# Altium PCB PCB_1.pcbdoc
Units mm, origin at the board's own origin, x right, y up, seen from the top; angles counter-clockwise.
Board outline 109.98 x 65.02 mm, 2 copper layers (Top Layer, Bottom Layer); 32 components, 39 nets, 110 pads, 0 vias.
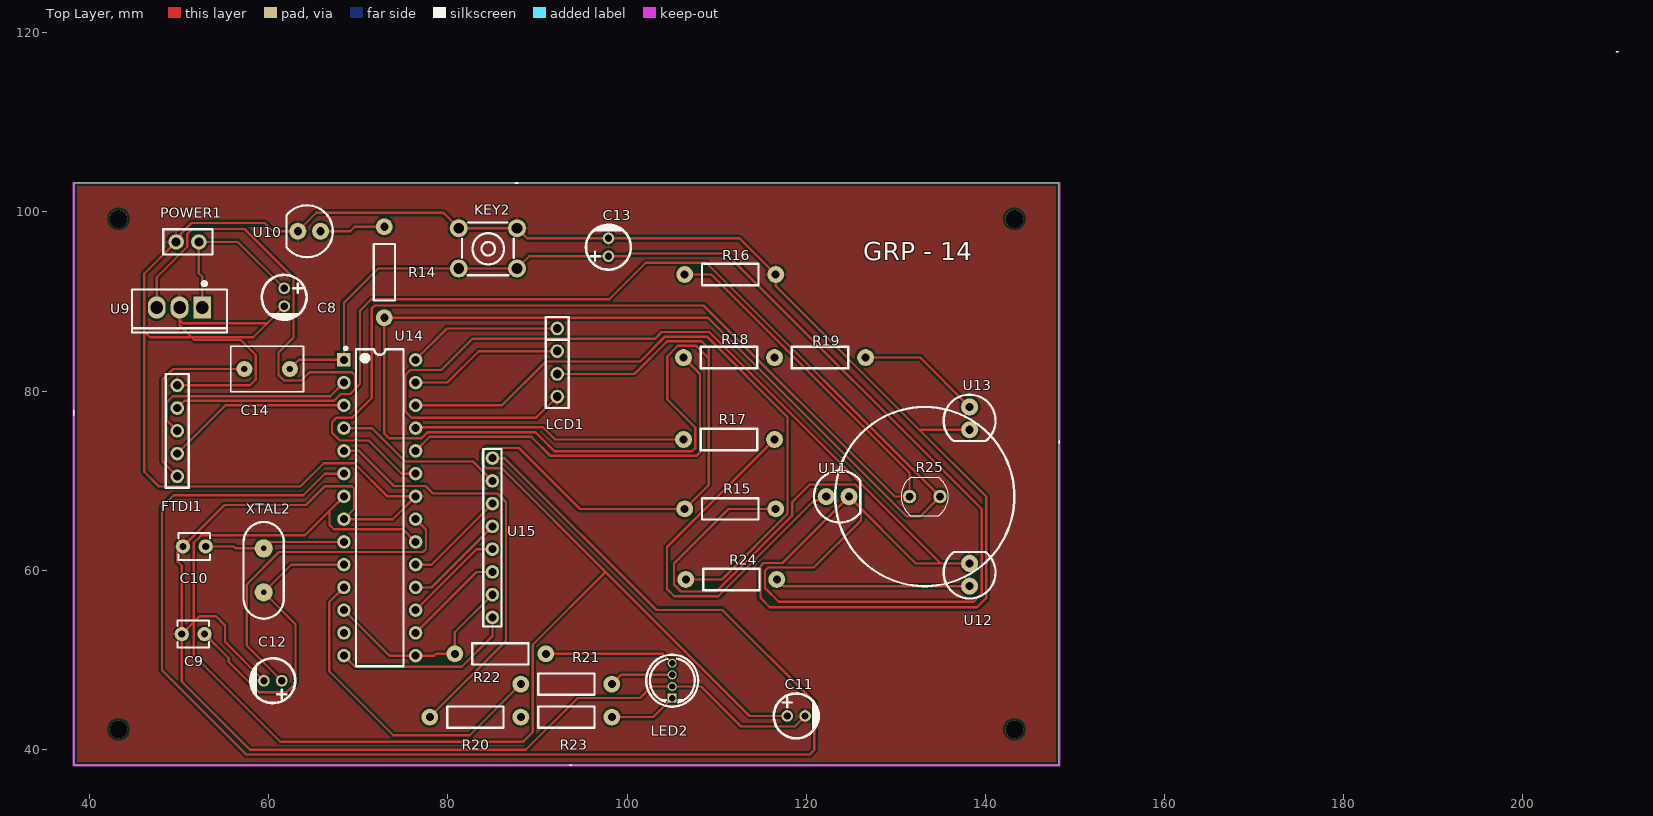
[diagram p0: Top Layer view]
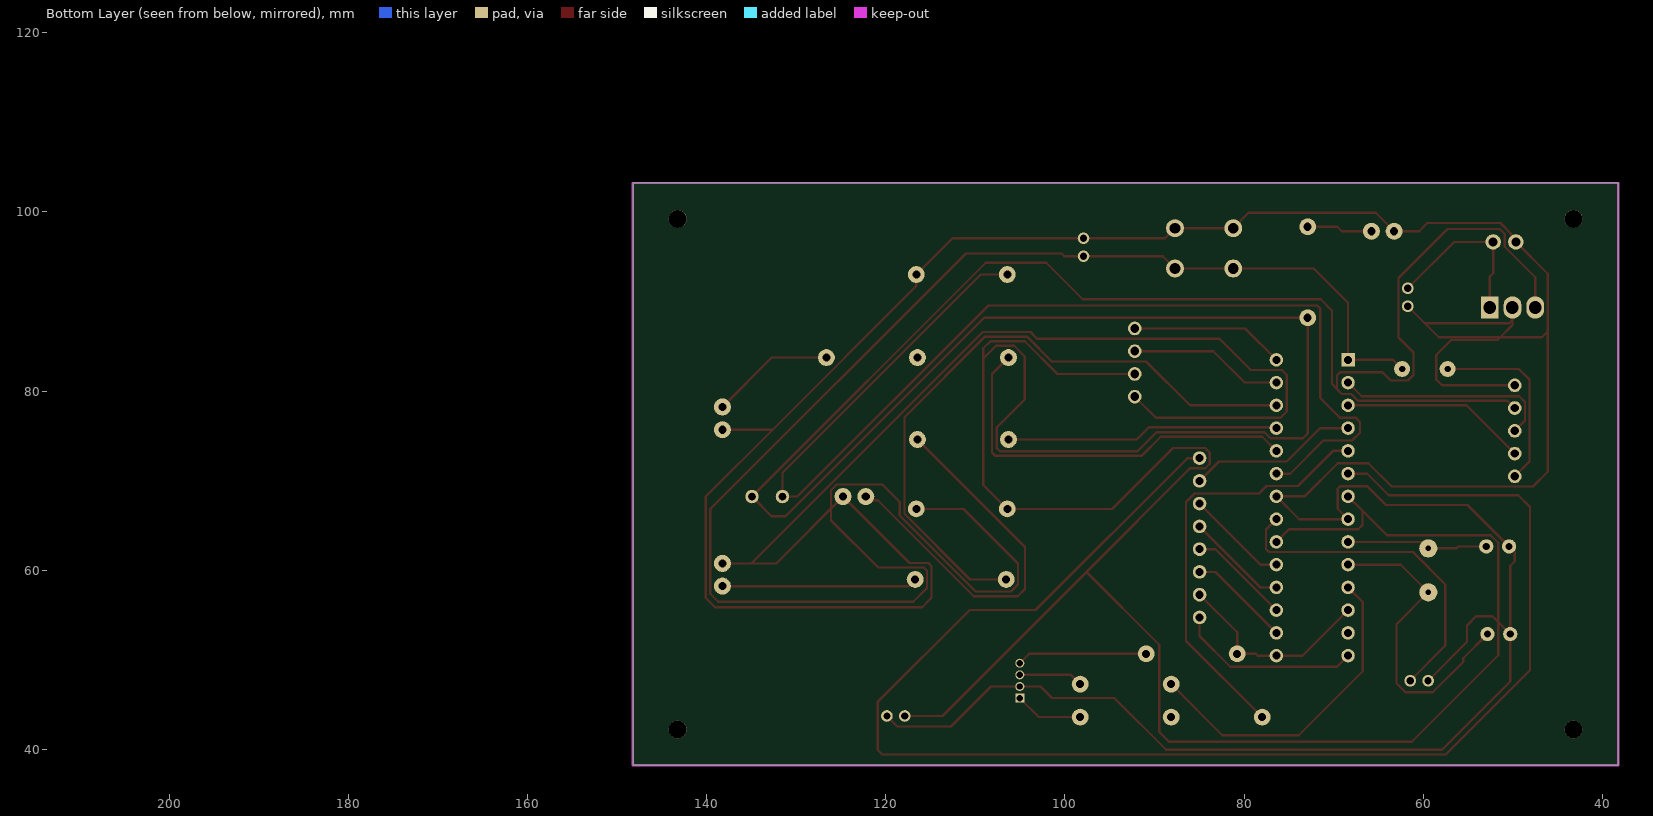
[diagram p1: Bottom Layer view, seen from below]

## Layer stack, top to bottom
Top Solder: solder mask 0.0102, Solder Resist, Dk 3.5
Top Layer: signal copper 0.0356
Dielectric1: dielectric 0.32, FR-4, Dk 4.8
Bottom Layer: signal copper 0.0356
Bottom Solder: solder mask 0.0102, Solder Resist, Dk 3.5

## Board outline
148.209,38.227 38.227,38.227 38.227,103.251 148.209,103.251

## Design rules (kind name [scope] priority, off if disabled: settings)
Clearance [All] p1: gap=0.254 ignorepadtopadclearanceinfootprint=FALSE except(0: Arc-Hole Track-Hole SMDPad-Hole THPad-Hole Via-Hole Fill-Hole Poly-Hole Region-Hole Text-Hole)
PolygonConnect [All] p1: connectstyle=Relief reliefconductorwidth=0.254 reliefentries=4 polygonreliefangle="90 Angle" airgapwidth=0.254
RoutingVias [All] p1: holewidth=0.711 width=1.27 viastyle="Through Hole" minholewidth=0.711 minwidth=1.27 maxholewidth=0.711 maxwidth=1.27
SolderMaskExpansion [All] p1: expansion=0.102 istentingtop=FALSE
Width [All] p1: maxlimit=0.254 minlimit=0.254 preferedwidth=0.254
30 further rules are at their usual default settings.

## Components (designator, comment, footprint, x,y, rotation, side; value= is the part's Value field where it differs from the comment)
C8 "330nF" CAP-TH_BD5.0-P2.00-D0.8-FD 61.722,90.472 r270 top
C9 "22pF" CAP-TH_L3.5-W3.0-P2.54-D0.8 51.562,52.88 r0 top
C10 "22pF" CAP-TH_L3.5-W3.0-P2.54-D0.8 51.689,62.659 r0 top
C11 "100nF" CAP-TH_BD5.0-P2.00-D0.8-FD 118.872,43.736 r0 top
C12 "100nF" CAP-TH_BD5.0-P2.00-D0.8-FD 60.452,47.673 r180 top
C13 "100nF" CAP-TH_BD5.0-P2.00-D0.8-FD 97.917,96.06 r90 top
C14 "100nF" RAD-0.2 59.817,82.471 r0 top
FTDI1 "Male Header 1*5P" "MALE HEADER 5P" 49.784,70.485 r180 top
KEY2 "RST_BTN" KEY-TH_4P-L6.0-W6.0-P4.50 84.455,95.933 r180 top
LCD1 "Header-Male-2.54_1x4" MALE_HEADER_4_PIN 92.202,83.185 r270 top
LED2 "φ5 RGB Transparent" LED-TH_4P-BD5.8-P1.30 105.029,47.673 r270 top
POWER1 "2 Pin Male Header" 1X2/2.54_MALE_PIN_HEADER 50.927,95.377 r180 top
R14 "330Ω" AXIAL-0.4 72.898,93.266 r90 top
R15 "10K" AXIAL-0.4 111.506,66.85 r180 top
R16 "1K" AXIAL-0.4 111.506,93.012 r0 top
R17 "330Ω" AXIAL-0.4 111.379,74.597 r0 top
R18 "330Ω" AXIAL-0.4 111.379,83.741 r0 top
R19 "330Ω" AXIAL-0.4 121.539,83.741 r0 top
R20 "330Ω" AXIAL-0.4 83.058,43.609 r0 top
R21 "330Ω" AXIAL-0.4 93.218,47.292 r0 top
R22 "330Ω" AXIAL-0.4 85.852,50.673 r0 top
R23 "330Ω" AXIAL-0.4 93.218,43.609 r0 top
R24 "330Ω" AXIAL-0.4 111.633,58.976 r0 top
R25 "LDR07" RESISTOR_LDR_5.1X4.3_RM3.4 133.227,68.227 r0 top
U9 "7805_Regulator" TO-220-3_L10.0-W4.5-P2.54-L 50.038,89.329 r180 top
U10 "LED" "5MM LED" 65.786,97.838 r180 top
U11 "GREEN_LED" "5MM LED" 122.227,68.227 r0 top
U12 "BLUE_LED" "5MM LED" 138.227,58.227 r90 top
U13 "RED_LED" "5MM LED" 138.227,78.227 r270 top
U14 "ATMEGA _328P-PU" DIP-28_L34.6-W7.3-P2.54-LS10.2-BL 72.39,66.977 r270 top
U15 "8 pin Male header" "8 PIN MALE HEADER PCB" 84.963,72.517 r180 top
XTAL2 "16MHz" "16MHZ_OSC [PCB]" 59.436,59.992 r0 top

## Footprints (in the part's own frame and the unit in brackets; to place one, negate y for a bottom-side part, rotate by r counter-clockwise, add the part's x,y. Pads: shape width x height; smd on the part's side, far side on the other; paste and mask are expansions set on the pad)
1X2/2.54_MALE_PIN_HEADER [mil]
  round 67.99 hole 40: 1(-50,-50) 2(50,-50)
  silkscreen extent -109,-106 107,6
"5MM LED" [mm]
  round 1.9 hole 0.914: 1(0,0) 2(2.54,0)
  silkscreen extent -1.37,-2.9 3.81,2.9
"8 PIN MALE HEADER PCB" [mil]
  round 60 hole 36: 1(0,700) 2(0,600) 3(0,500) 4(0,400) 5(0,300) 6(0,200) 7(0,100) 8(0,0)
  silkscreen extent -40,-40 40,740
"16MHZ_OSC [PCB]" [mil]
  round 80 hole 25: 1(0,96.46) 2(0,-96.46)
  silkscreen extent -88,-212 88,212
AXIAL-0.4 [mil]
  round 74 hole 35.4: 1(-200,0) 2(200,0)
  silkscreen extent -124,-47 124,47
CAP-TH_BD5.0-P2.00-D0.8-FD [mm]
  round 1.3 hole 0.8: 1(-1,0) 2(1,0)
  silkscreen extent -2.5,-2.5 2.5,2.5
CAP-TH_L3.5-W3.0-P2.54-D0.8 [mm]
  round 1.6 hole 0.8: 1(-1.27,0) 2(1.27,0)
  silkscreen extent -1.75,-1.5 1.75,1.5
DIP-28_L34.6-W7.3-P2.54-LS10.2-BL [mm]
  rect 1.5x1.5 hole 0.9: 1(-16.51,-4)
  round 1.5 hole 0.9: 2(-13.97,-4) 3(-11.43,-4) 4(-8.89,-4) 5(-6.35,-4) 6(-3.81,-4) 7(-1.27,-4) 8(1.27,-4) 9(3.81,-4) 10(6.35,-4) 11(8.89,-4) 12(11.43,-4) 13(13.97,-4) 14(16.51,-4) 15(16.51,4) 16(13.97,4) 17(11.43,4) 18(8.89,4) 19(6.35,4) 20(3.81,4) 21(1.27,4) 22(-1.27,4) 23(-3.81,4) 24(-6.35,4) 25(-8.89,4) 26(-11.43,4) 27(-13.97,4) 28(-16.51,4)
  silkscreen extent -17.94,-3.95 17.7,2.65
KEY-TH_4P-L6.0-W6.0-P4.50 [mm]
  round 2 hole 1.2: 1(-3.25,-2.25) 2(3.25,-2.25) 3(3.25,2.25) 4(-3.25,2.25)
  silkscreen extent -2.9,-2.9 2.9,3
LED-TH_4P-BD5.8-P1.30 [mm]
  rect 1x1 hole 0.7: 1(1.95,0)
  round 1 hole 0.7: 2(0.65,0) 3(-0.65,0) 4(-1.95,0)
  silkscreen extent -2.9,-2.9 2.9,2.9
"MALE HEADER 5P" [mil]
  round 60 hole 36: 1(0,0) 2(0,-100) 3(0,-200) 4(0,-300) 5(0,-400)
  silkscreen extent -50,-450 50,50
MALE_HEADER_4_PIN [mil]
  round 60 hole 39.37: 1(-150,0) 2(-50,0) 3(50,0) 4(150,0)
  silkscreen extent -200,-50 200,50
RAD-0.2 [mil]
  round 70 hole 28: 1(100,0) 2(-100,0)
  silkscreen extent -160,-100 160,100
RESISTOR_LDR_5.1X4.3_RM3.4 [mm]
  round 1.5 hole 0.8 slot 0.805 at 0 deg: 1(-1.7,0) 2(1.701,0)
  silkscreen extent -2.65,-2.15 2.62,2.17
TO-220-3_L10.0-W4.5-P2.54-L [mm]
  rect 2x2.5 hole 1.4: 1(-2.54,0)
  oval 2x2.5 hole 1.4: 2(0,0) 3(2.54,0)
  silkscreen extent -5.3,-2.86 5.3,2.8

## Free pads (board coordinates)
  round 2 hole 2 unplated: ""(43.227,42.227) ""(43.227,99.227) ""(143.227,42.227) ""(143.227,99.227)

## Nets (pads, with @x,y where several pads share a name; then routed paths per layer and width w, separated by ;. In a path a pad name is that pad's centre, name@x,y a point inside that pad or via, vN(x,y) a via of type N, cw(c..) or ccw(c..) an arc to the next point about the centre after c; other vN are vias at no path point)
1: U14.18 U15.5 | length 11.4
  Top Layer w0.254: U14.18 78.153,58.087 U15.5
2: U14.19 U15.6 | length 11.4
  Top Layer w0.254: U14.19 78.153,60.627 U15.6
3: U14.4 U15.7 | length 19
  Top Layer w0.254: U14.4 71.504,75.867 75.222,72.149 82.791,72.149 U15.7
4: U14.6 U15.8 | length 169.5
  Top Layer w0.254: U14.6 66.254,70.787 63.844,68.377 49.403,68.377 48.082,67.056 48.082,48.844 57.481,39.446 120.395,39.446 120.904,39.954 120.904,45.288 110.617,55.575 103.269,55.575 86.327,72.517 U15.8
5V: C11.1 FTDI1.4 LCD1.3 R14.1 R15.2 R25.2 U9.3 U14.7 U14.20 | length 509.7
  Top Layer w0.254: U9.3 47.498,92.71 50.902,96.114 50.902,97.536 51.46,98.095 57.302,98.095 62.763,92.634 62.763,85.979 61.087,84.303 61.087,81.788 61.697,81.178 63.627,81.178 64.541,82.093 69.291,82.093 69.621,81.763 69.621,80.213 ; FTDI1.4 50.597,78.918 67.285,78.918 68.047,79.68 69.088,79.68 69.621,80.213 ; U14.7 66.777,66.634 ; U14.20 74.99,64.567 67.259,64.567 66.777,65.049 66.777,66.634 ; LCD1.3 100.815,81.915 104.473,85.573 108.315,85.573 109.106,84.782 109.106,83.642 ; C11.1 113.668,43.736 97.587,59.817 ; 66.777,66.634 64.049,63.906 52.476,63.906 51.638,63.068 51.638,50.521 61.29,40.869 88.392,40.869 89.459,41.935 89.459,51.689 97.587,59.817 ; 69.621,80.213 70.18,80.823 70.18,88.976 71.45,90.246 97.993,90.246 102.08,94.333 108.822,94.333 R25.2 132.741,66.04 131.18,66.04 109.034,88.186 R14.1 72.898,75.26 73.431,74.727 77.04,74.727 77.724,75.411 89.764,75.411 91.899,73.276 107.236,73.276 107.62,73.66 107.62,75.921 104.47,79.07 104.47,83.871 105.664,85.065 107.696,85.065 109.106,83.642 ; 97.587,59.817 86.03,71.374 84.328,71.374 83.82,71.882 83.82,73.152 84.328,73.66 87.92,73.66 94.73,66.85 R15.2 109.106,69.53 109.106,83.642
A: U14.14 U15.1 | length 20.6
  Top Layer w0.254: U14.14 69.632,49.225 81.534,49.225 84.963,52.654 U15.1
B: R22.1 U14.12 U14.15 U15.2 | length 22.9
  Top Layer w0.254: U14.12 73.47,50.467 U14.15 78.461,50.467 78.667,50.673 R22.1 80.772,53.086 U15.2
BLUE: R24.1 U14.26 | length 73.6
  Top Layer w0.254: U14.26 86.027,78.407 90.932,83.312 101.459,83.312 104.228,86.081 108.912,86.081 117.907,77.086 117.907,66.303 110.58,58.976 R24.1
C: U14.16 U15.3 | length 11.4
  Top Layer w0.254: U14.16 83.2,59.817 U15.3
C5_2: C14.2 FTDI1.1 | length 21.1
  Top Layer w0.254: FTDI1.1 48.133,72.136 48.133,81.28 49.324,82.471 C14.2
D: U14.17 U15.4 | length 11.4
  Top Layer w0.254: U14.17 83.2,62.357 U15.4
G: R21.1 U14.11 | length 36.7
  Top Layer w0.254: U14.11 66.751,56.448 66.751,48.729 73.887,41.593 82.438,41.593 R21.1
GND: C8.2 C9.1 C10.1 C11.2 C12.2 C13.2 FTDI1.5 KEY2.1 KEY2.2 LCD1.4 LED2.2 POWER1.2 R16.2 U9.2 U10.2 U11.2 U12.2 U13.2 U14.8 U14.22 | length 531.7
  Top Layer w0.254: FTDI1.5 57.912,80.645 58.547,81.28 58.547,84.023 56.871,85.7 51.714,85.7 51.41,86.004 ; U9.2 50.038,87.935 ; C12.2 55.118,52.007 55.118,53.848 54.102,54.864 52.276,54.864 C9.1 ; C8.2 59.829,87.579 ; LCD1.4 89.84,77.013 75.946,77.013 75.235,77.724 75.235,81.788 75.794,82.347 79.248,82.347 82.753,85.852 103.099,85.852 103.835,86.589 109.176,86.589 134.998,60.767 ; C11.2 118.706,42.57 112.7,42.57 108.247,47.023 LED2.2 102.725,47.023 101.448,45.745 94.488,45.745 88.697,39.954 57.912,39.954 50.292,47.574 C9.1 ; U12.2 134.998,60.767 ; U13.2 132.618,75.687 ; 46.101,86.639 46.101,70.993 47.752,69.342 63.525,69.342 66.142,71.958 69.545,71.958 73.256,68.247 U14.22 73.85,65.707 U14.8 69.545,66.862 69.545,69.088 69.24,69.393 66.269,69.393 64.16,67.285 55.045,67.285 C10.1 49.784,62.024 49.784,61.008 50.292,60.5 C9.1 ; 46.101,86.639 46.101,93.091 POWER1.2 50.165,97.155 50.165,97.536 51.384,98.755 59.538,98.755 60.455,97.838 U10.2 65.306,99.898 79.49,99.898 KEY2.2 KEY2.1 88.828,97.06 C13.2 112.538,97.06 R16.2 116.586,91.719 132.618,75.687 ; 46.101,86.639 46.736,86.004 51.41,86.004 ; 50.038,87.935 50.038,87.376 51.41,86.004 ; 50.038,87.935 50.394,87.579 59.829,87.579 ; 51.41,86.004 58.254,86.004 59.829,87.579 ; 132.618,75.687 140.081,68.224 140.081,56.896 139.065,55.88 115.926,55.88 114.884,56.921 114.884,60.452 115.237,60.805 117.345,60.805 U11.2 132.227,60.767 134.998,60.767
GREEN: R17.1 U14.25 | length 30.5
  Top Layer w0.254: U14.25 76.494,75.971 90.599,75.971 91.973,74.597 R17.1
LDR: R16.1 R25.1 U14.23 | length 133.9
  Top Layer w0.254: U14.23 74.857,70.787 71.171,74.473 67.945,74.473 67.056,75.362 67.056,76.53 67.564,77.038 69.317,77.038 71.503,79.224 71.503,89.206 71.857,89.56 108.534,89.56 129.868,68.227 R25.1 131.527,70.88 109.395,93.012 R16.1
R: R20.1 U14.5 | length 48
  Top Layer w0.254: U14.5 70.07,73.327 73.981,69.416 77.498,69.416 78.334,68.58 85.524,68.58 86.473,67.631 86.473,52.104 R20.1
R2_2: R24.2 U12.1 | length 21.8
  Top Layer w0.254: R24.2 117.462,58.227 U12.1
R3_2: R14.2 U10.1 | length 7.3
  Top Layer w0.254: U10.1 69.088,97.838 69.596,98.346 R14.2
R9_1: R18.2 R19.1
R11_2: LED2.3 R21.2 | length 7.2
  Top Layer w0.254: R21.2 99.329,48.323 LED2.3
R12_2: LED2.4 R22.2 | length 14.5
  Top Layer w0.254: R22.2 103.979,50.673 LED2.4
R13_1: R20.2 R23.1
R13_2: LED2.1 R23.2 | length 7.6
  Top Layer w0.254: R23.2 102.915,43.609 LED2.1
RED: R18.1 U14.24 | length 44.8
  Top Layer w0.254: U14.24 77.966,74.903 89.308,74.903 91.443,72.768 107.744,72.768 108.128,73.152 108.128,81.912 R18.1
RESET: C13.1 C14.1 KEY2.3 KEY2.4 R15.1 U14.1 | length 194.6
  Top Layer w0.254: C14.1 63.373,83.487 U14.1 68.39,89.865 72.208,93.683 KEY2.3 KEY2.4 89.082,95.06 C13.1 100.065,95.06 100.353,95.349 111.052,95.349 139.573,66.827 139.573,57.379 138.684,56.49 116.916,56.49 115.392,58.014 115.392,59.944 115.745,60.297 120.845,60.297 126.111,65.562 126.111,68.936 125.476,69.571 120.396,69.571 118.437,67.612 118.437,66.115 109.955,57.633 106.02,57.633 105.232,58.42 105.232,60.755 111.328,66.85 R15.1
RX: FTDI1.3 U14.2 | length 24.3
  Top Layer w0.254: FTDI1.3 48.641,76.708 48.641,78.791 49.276,79.426 66.869,79.426 U14.2
S$1303: 
S$1308: 
S$1310: 
S$1312: 
SCL: LCD1.1 U14.28 | length 17.3
  Top Layer w0.254: U14.28 79.898,86.995 LCD1.1
SDA: LCD1.2 U14.27 | length 17.3
  Top Layer w0.254: U14.27 79.931,80.947 83.439,84.455 LCD1.2
TX: FTDI1.2 U14.3 | length 20.8
  Top Layer w0.254: FTDI1.2 55.166,78.407 U14.3
U1_9: C10.2 U14.9 XTAL2.1 | length 15.8
  Top Layer w0.254: C10.2 56.083,62.659 56.3,62.442 XTAL2.1 60.161,63.167 U14.9
U1_10: C9.2 U14.10 XTAL2.2 | length 35.4
  Top Layer w0.254: C9.2 55.54,50.172 55.54,49.768 58.928,46.38 61.976,46.38 62.992,47.396 62.992,53.986 XTAL2.2 62.521,60.627 U14.10
U1_21: C12.1 U14.21 | length 37.8
  Top Layer w0.254: C12.1 57.531,51.594 57.531,58.42 61.138,62.027 77.216,62.027 77.546,62.357 77.546,64.551 U14.21
U6_1: R17.2 U11.1 | length 44.6
  Top Layer w0.254: R17.2 104.457,62.595 104.457,57.912 105.27,57.099 110.16,57.099 120.879,67.818 122.227,67.818 U11.1
U8_1: R19.2 U13.1 | length 13.9
  Top Layer w0.254: R19.2 132.713,83.741 U13.1
VCC: C8.1 POWER1.1 U9.1 | length 19.1
  Top Layer w0.254: U9.1 52.578,92.786 52.197,93.167 POWER1.1 56.547,96.647 C8.1
pads on no net: U14.13

## Polygon pours and split planes (outlines as drawn)
GND on Top Layer "GND_L01_P000" (solid, pour order 0): 38.227,103.227 38.227,38.227 148.227,38.227 148.227,103.227

## Silkscreen, mask and mechanical layers (free items; w line width, h text height)
Top Overlay:
  circle w0.254: c133.227,68.227 r10
  lines w0.2: 38.227,77.343 38.227,77.827 ; 87.503,103.227 87.757,103.227 ; 93.626,38.227 93.826,38.227 ; 148.227,74.222 148.227,74.422 ; 210.439,117.883 210.639,117.883
  text "GRP - 14" at 126.365,94.615 h2.03